# EAGLE board BaliseEmetteur (EAGLE 6.5.0)
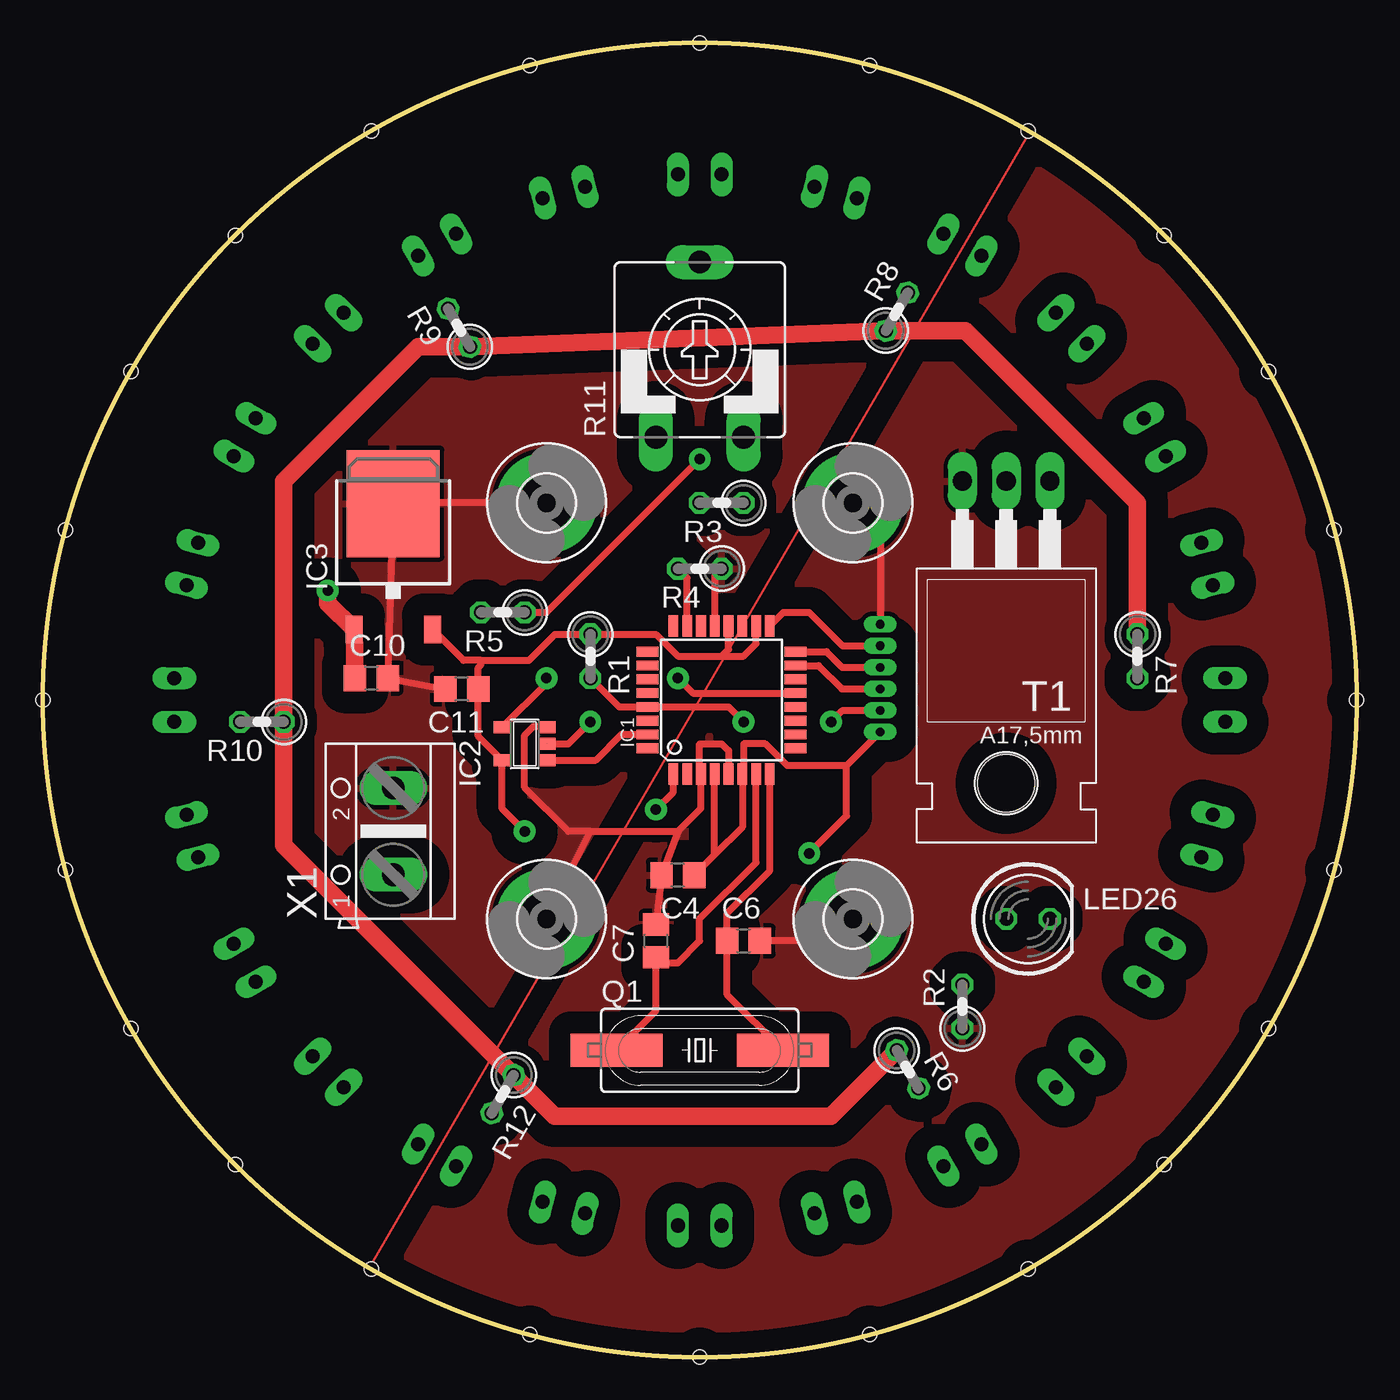
[diagram p0: board, top side]
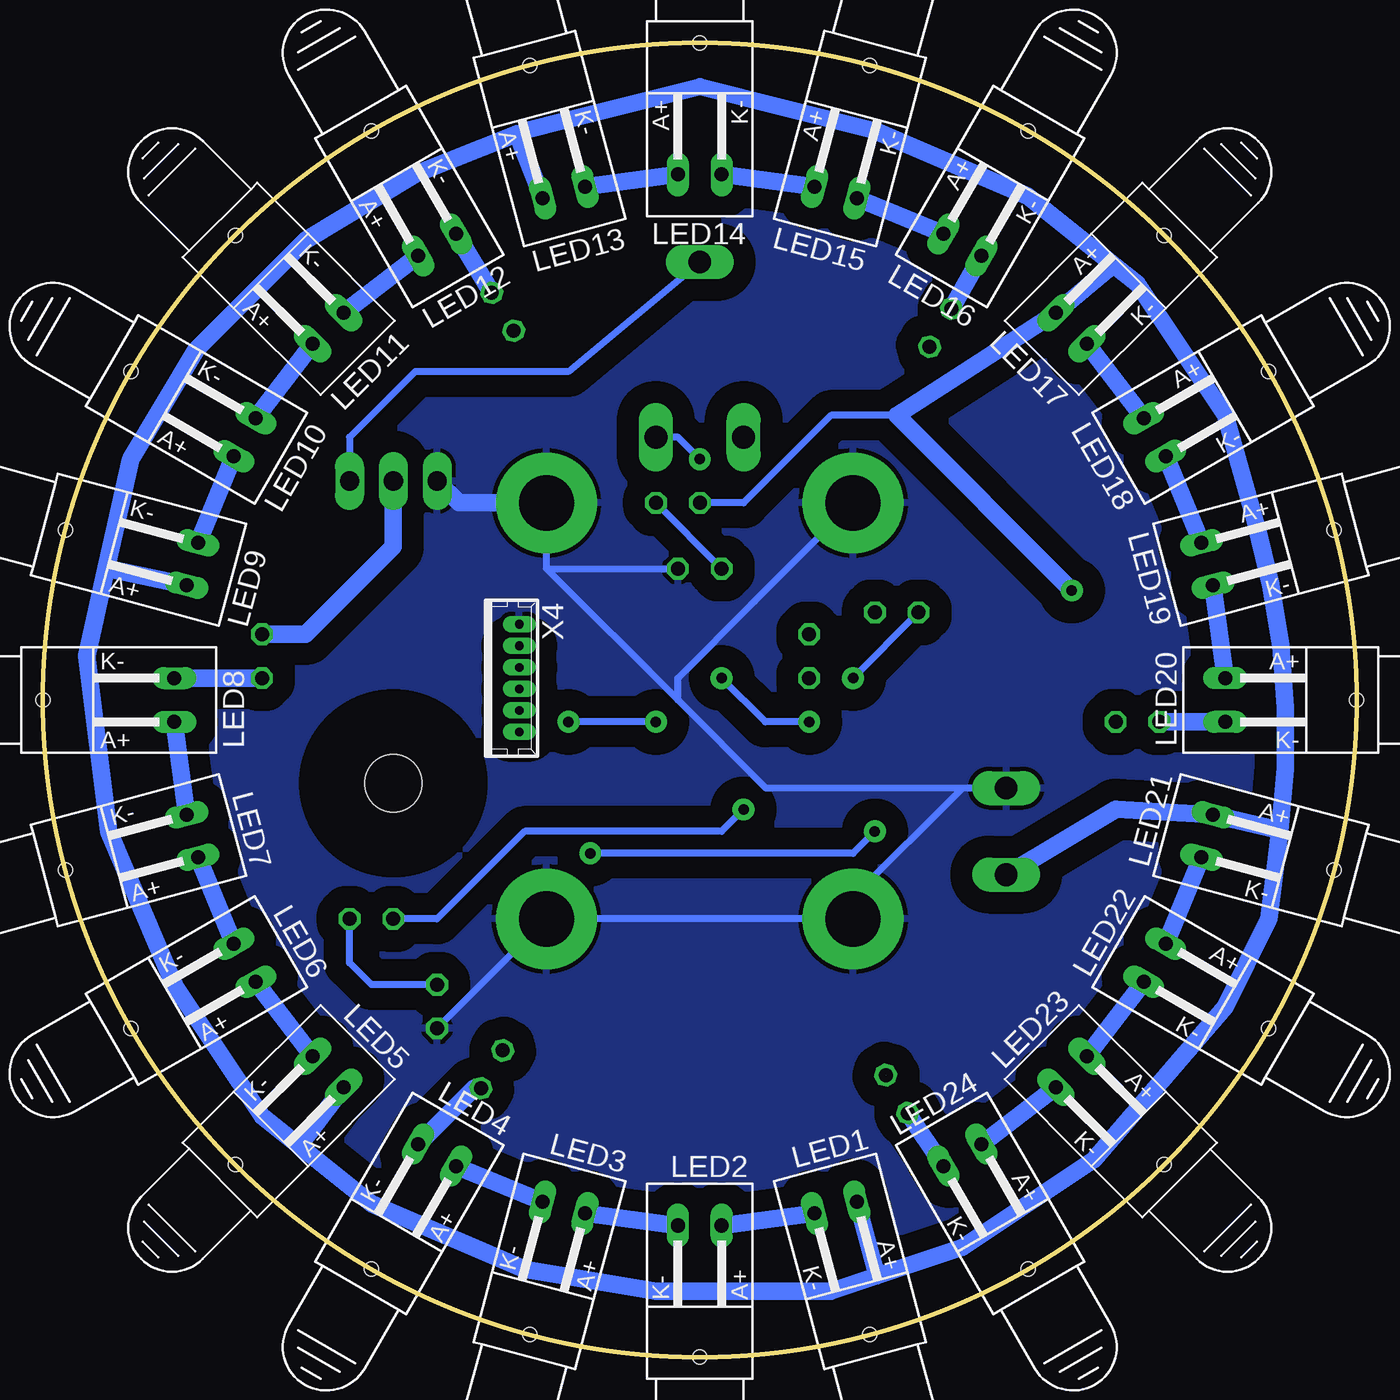
[diagram p1: board, bottom side, seen from below]

Size 76.2 x 76.2 mm. Coordinates in mm from the lower left corner, seen from the top.
Outline: circle at 38.1,38.1 radius 38.1
Copper layers (1*16): Top 0.035mm / dielectric 1.5mm / Bottom 0.035mm
Design rules "The PCB Shop": minimum track width 0.2mm, minimum drill 0.35mm, track to track 0.2mm, track to pad 0.2mm, pad to pad 0.2mm, via to via 0.2mm, smd to smd 0.2mm, copper to edge 30mil, drill to drill 10mil, minimum pad ring 0.225mm, minimum via ring 0.225mm, stop-mask expansion 0mil, vias tented up to drill 0mil, thermal gap 10mil

## Footprints (pad centres in the part's own frame; a part is rotated, then mirrored left to right if it is on the bottom)
C0805 = smd 1.3 x 1.5: 1 -0.95,0; 2 0.95,0
3,2-PAD = drill 3.2 pad 5.842: B3,2 0,0
TQFP32-08 = smd 1.27 x 0.559: 1 -4.293,2.8; 2 -4.293,2; 3 -4.293,1.2; 4 -4.293,0.4; 5 -4.293,-0.4; 6 -4.293,-1.2; 7 -4.293,-2; 8 -4.293,-2.8; 17 4.293,-2.8; 18 4.293,-2; 19 4.293,-1.2; 20 4.293,-0.4; 21 4.293,0.4; 22 4.293,1.2; 23 4.293,2; 24 4.293,2.8 | smd 0.559 x 1.27: 9 -2.8,-4.293; 10 -2,-4.293; 11 -1.2,-4.293; 12 -0.4,-4.293; 13 0.4,-4.293; 14 1.2,-4.293; 15 2,-4.293; 16 2.8,-4.293; 25 2.8,4.293; 26 2,4.293; 27 1.2,4.293; 28 0.4,4.293; 29 -0.4,4.293; 30 -1.2,4.293; 31 -2,4.293; 32 -2.8,4.293
SOT23-5 = smd 0.69 x 0.99: 1 -0.95,-1.29; 2 0,-1.29; 3 0.95,-1.29; 4 0.95,1.3; 5 -0.95,1.3
TO252 = smd 1 x 1.6: 1 -2.28,-4.8; 2 2.28,-4.8 | smd 5.4 x 6.2: 3 0,2.5
Q62902-B155 = drill 0.813 long: A 7.62,-1.27; K 7.62,1.27 | hole 0.813: 0,0
LED5MM = drill 0.813 octagon: A -1.27,0; K 1.27,0
HC49UP = smd 5.334 x 1.93: 1 -4.826,0; 2 4.826,0
0207/2V = drill 0.813 octagon: 1 -1.27,0; 2 1.27,0
CA9V = drill 1.321 long: A -2.54,-5.08; E 2.54,-5.08; S 0,5.08
TO220 = drill 1.118 long: 1 -2.54,-6.35; 2 0,-6.35; 3 2.54,-6.35 | hole 3.302: 0,11.176
AK500/2 = drill 1.321 long: 1 -2.515,0; 2 2.515,0
53047-06 = drill 0.5 pad 0.698 long: 1 3.125,0.45; 2 1.875,0.45; 3 0.625,0.45; 4 -0.625,0.45; 5 -1.875,0.45; 6 -3.125,0.45

## Placement (x,y rotation side)
C4  100nF  [C0805]  36.83,27.94 180 top
C6  22pF  [C0805]  40.64,24.13 0 top
C7  22pF  [C0805]  35.56,24.13 90 top
C10  330n  [C0805]  19.05,39.37 0 top
C11  100n  [C0805]  24.3,38.74 180 top
H1  [3,2-PAD]  46.99,49.53 0 top
H2  [3,2-PAD]  29.21,49.53 0 top
H3  [3,2-PAD]  46.99,25.4 0 top
H4  [3,2-PAD]  29.21,25.4 0 top
IC1  MEGA8-AI  [TQFP32-08]  39.37,38.1 90 top
IC2  74AHC1G02DBV  [SOT23-5]  27.94,35.56 90 top
IC3  7805DT  [TO252]  20.32,46.99 0 top
LED1  [Q62902-B155]  28.24,1.3 105 bottom
LED2  [Q62902-B155]  38.1,0 90 bottom
LED3  [Q62902-B155]  47.96,1.3 75 bottom
LED4  [Q62902-B155]  57.15,5.1 60 bottom
LED5  [Q62902-B155]  65.04,11.16 45 bottom
LED6  [Q62902-B155]  71.1,19.05 30 bottom
LED7  [Q62902-B155]  74.9,28.24 15 bottom
LED8  [Q62902-B155]  76.2,38.1 0 bottom
LED9  [Q62902-B155]  74.9,47.96 345 bottom
LED10  [Q62902-B155]  71.1,57.15 330 bottom
LED11  [Q62902-B155]  65.04,65.04 315 bottom
LED12  [Q62902-B155]  57.15,71.1 300 bottom
LED13  [Q62902-B155]  47.96,74.9 285 bottom
LED14  [Q62902-B155]  38.1,76.2 270 bottom
LED15  [Q62902-B155]  28.24,74.9 255 bottom
LED16  [Q62902-B155]  19.05,71.1 240 bottom
LED17  [Q62902-B155]  11.16,65.04 225 bottom
LED18  [Q62902-B155]  5.1,57.15 210 bottom
LED19  [Q62902-B155]  1.3,47.96 195 bottom
LED20  [Q62902-B155]  0,38.1 180 bottom
LED21  [Q62902-B155]  1.3,28.24 165 bottom
LED22  [Q62902-B155]  5.1,19.05 150 bottom
LED23  [Q62902-B155]  11.16,11.16 135 bottom
LED24  [Q62902-B155]  19.05,5.1 120 bottom
LED26  [LED5MM]  57.15,25.4 0 top
Q1  16MHz  [HC49UP]  38.1,17.78 0 top
R1  10k  [0207/2V]  31.75,40.64 270 top
R2  470  [0207/2V]  53.34,20.32 90 top
R3  10k  [0207/2V]  39.37,49.53 180 top
R4  10k  [0207/2V]  38.1,45.72 180 top
R5  4k7  [0207/2V]  26.67,43.18 180 top
R6  10  [0207/2V]  50.16,16.68 300 top
R7  10  [0207/2V]  63.5,40.64 270 top
R8  10  [0207/2V]  49.53,60.62 60 top
R9  10  [0207/2V]  24.13,59.69 120 top
R10  10  [0207/2V]  12.7,36.83 180 top
R11  220k  [CA9V]  38.1,58.42 0 top
R12  10  [0207/2V]  26.67,15.24 240 top
T1  TIP122  [TO220]  55.88,44.45 180 top
X1  ALIM  [AK500/2]  20.32,30.48 90 top
X4  ISP  [53047-06]  49.02,39.37 270 bottom

## Library data of the parts
C4 C6 C7 C10 C11 R1-R10 R12 = rcl
H1-H4 = holes
IC1 = atmel
IC2 = 74xx-little-us
IC3 = linear
LED1-LED24 LED26 = led
Q1 = crystal
R11 = pot
T1 = transistor
X1 = con-ptr500
X4 = con-molex

## Nets
+5V: C4.1 C11.1 IC1.4 IC1.6 IC1.18 IC1.20 IC2.5 IC3.2 R1.1 X4.1
+12V: C10.1 IC3.1 LED1.A LED5.A LED9.A LED13.A LED17.A LED21.A R3.2 X1.1
BATT_ADC: IC1.23 R3.1 R4.2
GND: C4.2 C6.2 C7.2 C10.2 C11.2 H1.B3,2 H2.B3,2 H3.B3,2 H4.B3,2 IC1.3 IC1.5 IC1.21 IC2.3 IC3.3 R2.1 R4.1 T1.3 X1.2 X4.6
ISP_MISO: IC1.16 X4.4
ISP_MOSI: IC1.15 X4.3
ISP_RST: IC1.29 R1.2 X4.2
ISP_SCK: IC1.17 X4.5
N$1: LED26.K R2.2
N$2: LED1.K LED2.A
N$3: R5.1 R11.E
N$4: IC1.1 LED26.A
N$5: LED3.K LED4.A
N$6: LED6.K LED7.A
N$7: LED5.K LED6.A
N$8: C7.1 IC1.7 Q1.1
N$9: C6.1 IC1.8 Q1.2
N$10: LED7.K LED8.A
N$11: LED18.K LED19.A
N$12: LED9.K LED10.A
N$13: LED2.K LED3.A
N$14: LED11.K LED12.A
N$16: LED13.K LED14.A
N$17: R6.1 R7.1 R8.1 R9.1 R10.1 R12.1 T1.2
N$18: LED15.K LED16.A
N$20: LED22.K LED23.A
N$21: LED17.K LED18.A
N$22: LED19.K LED20.A
N$23: LED4.K R6.2
N$24: LED21.K LED22.A
N$25: LED10.K LED11.A
N$26: LED23.K LED24.A
N$27: LED8.K R7.2
N$28: LED14.K LED15.A
N$29: LED12.K R8.2
N$30: LED16.K R9.2
N$31: R11.S T1.1
N$32: LED20.K R10.2
N$33: LED24.K R12.2
N$35: IC2.4 R5.2
PWM: IC1.13 IC2.2
UART_TX: IC1.31 IC2.1

## Tracks (layer width: path | path; a pad name or v marks a point on that pad's centre or on a via)
+5V  (via drill 0.61 pad 1.27)
  Top 0.406: IC3.2 24.39,40.4 25.4,40.4 | 39.37,40.64 36.83,40.64 35.56,41.91 R1.1 29.7,41.91 28.18,40.4 25.4,40.4 | 39.37,40.64 39.77,41.04 IC1.20 | IC1.18 41.37,41.37 40.64,40.64 39.37,40.64 | 38.97,29.13 IC1.4 | 38.97,29.13 C4.1 | 38.97,29.13 40.57,30.73 IC1.6 40.64,33.88 40.64,35.56 41.91,35.56 43.18,34.29 46.62,34.29 | 27.91,30.51 v27.94,30.48 26.64,31.78 IC2.5 25.25,36 C11.1 25.25,39.98 25.4,40.13 25.4,40.4 | 46.62,34.29 X4.1 | v44.45,29.21 46.62,31.38 46.62,34.29
  Bottom 0.406: v27.94,30.48 29.21,29.21 v44.45,29.21
+12V  (via drill 0.61 pad 1.27)
  Top 1.016: C10.1 IC3.1 16.51,43.72 v16.51,44.45
  Bottom 0.406: 48.26,71.12 48.7,70.94 | R3.2 35.56,49.53 30.48,54.61 26.67,54.61
  Bottom 1.016: 4.43,30.56 4.77,27.9 5.08,25.4 7.62,20.32 15.24,11.43 22.86,6.35 27.81,4.7 | 4.43,30.56 arc-23 5.8,48.23 7.62,54.61 12.7,62.23 14.09,63.34 | 14.09,63.34 19.05,67.31 27.94,71.12 38.1,73.66 45.87,71.72 48.26,71.12 | 72.52,45.75 73.66,40.64 72.39,30.48 68.58,21.59 63.5,13.97 61.33,12.24 | 72.52,45.75 71.99,48.17 71.12,52.07 67.31,58.42 60.96,64.77 54.61,68.58 48.7,70.94 LED13.A | 61.33,12.24 57.15,8.89 48.26,5.08 40.64,3.81 30.48,3.81 27.81,4.7 | 4.43,30.56 LED21.A 13.97,31.75 X1.1 | 14.09,63.34 LED17.A 26.67,54.61 v16.51,44.45 | 72.52,45.75 LED9.A | 61.33,12.24 LED5.A | 27.81,4.7 LED1.A | v16.51,44.45
BATT_ADC
  Top 0.406: R4.2 37.37,45.18 IC1.23
  Bottom 0.406: R4.2 R3.1
GND
  Top 0.406: H2.B3,2 20.36,49.53 IC3.3 C10.2 C11.2 | 36.83,30.48 38.17,31.82 IC1.3 38.1,33.88 38.1,35.56 39.37,35.56 39.77,35.16 IC1.5 | 31.75,30.48 36.83,30.48 | 36.83,30.48 C4.2 C7.2 | H4.B3,2 31.75,30.48 | IC1.21 38.97,45.32 R4.1 | 29.21,36.51 IC2.3 29.16,36.58 28.45,36.58 27.94,36.07 27.94,33.02 30.48,30.48 31.75,30.48 | C6.2 45.72,24.13 H3.B3,2 | X4.6 48.57,47.95 H1.B3,2
  Bottom 0.406: X1.2 22.86,32.99 | 22.86,32.99 25.4,32.99 34.26,32.99 39.37,38.1 | 39.37,38.1 39.37,39.37 34.92,43.81 H2.B3,2 | 46.99,45.72 H1.B3,2 | 39.37,38.1 46.99,45.72 | R4.1 46.99,45.72 | R2.1 H3.B3,2 H4.B3,2 29.21,26.64 22.86,32.99 | R2.1
  Bottom 1.016: T1.3 52.07,49.53 H1.B3,2
  pour Top (isolate 1.27): 86.36,85.09 -8.89,85.09 -8.89,-12.7 86.36,-12.7
  pour Bottom (isolate 1.27): -8.89,85.09 86.36,85.09 86.36,-12.7 -8.89,-12.7
ISP_MISO
  Top 0.406: IC1.16 45.46,40.9 46.37,39.99 X4.4
ISP_MOSI
  Top 0.406: IC1.15 44.99,40.1 46.34,38.74 X4.3
ISP_RST  (via drill 0.61 pad 1.27)
  Top 0.406: R1.2 33.42,37.7 IC1.29 39.77,37.7 v40.64,36.83 | v45.72,36.83 46.38,37.49 X4.2
  Bottom 0.406: v40.64,36.83 v45.72,36.83
ISP_SCK
  Top 0.406: IC1.17 42.96,43.18 44.45,43.18 46.38,41.24 X4.5
N$1
  Bottom 0.406: R2.2 57.15,21.59 58.42,22.86 LED26.K | LED26.K
N$2
  Bottom 1.016: LED1.K LED2.A
N$3  (via drill 0.61 pad 1.27)
  Top 0.406: R5.1 29.21,43.18 v38.1,52.07
  Bottom 0.406: v38.1,52.07 39.37,53.34 R11.E
N$4  (via drill 0.61 pad 1.27)
  Top 0.406: IC1.1 36.57,32.76 v35.56,31.75
  Bottom 0.406: v35.56,31.75 36.83,30.48 48.26,30.48 53.34,25.4 LED26.A | LED26.A
N$5
  Bottom 1.016: LED3.K LED4.A
N$6
  Bottom 1.016: LED6.K LED7.A
N$7
  Bottom 1.016: LED5.K LED6.A
N$8
  Top 0.406: Q1.1 35.56,20.07 C7.1 35.88,22.86 36.83,22.86 38.1,24.13 38.1,25.4 41.37,28.67 IC1.7
N$9
  Top 0.406: Q1.2 39.69,21.02 C6.1 39.69,25.72 42.17,28.2 IC1.8
N$10
  Bottom 1.016: LED7.K LED8.A
N$11
  Bottom 1.016: LED19.A LED18.K
N$12
  Bottom 1.016: LED9.K LED10.A
N$13
  Bottom 1.016: LED2.K LED3.A
N$14
  Bottom 1.016: LED12.A LED11.K
N$16
  Bottom 1.016: LED14.A LED13.K
N$17  (2 unrouted)
  Top 1.016: R6.1 45.72,13.97 29.67,13.97 R12.1 13.97,29.68 R10.1 13.97,50.8 21.76,58.59 R9.1 R8.1 53.51,59.52 63.5,49.53 R7.1
  Bottom 1.016: T1.2 55.88,46.99 60.96,41.91 R7.1
N$18
  Bottom 1.016: LED16.A LED15.K
N$20
  Bottom 1.016: LED23.A LED22.K
N$21
  Bottom 1.016: LED18.A LED17.K
N$22
  Bottom 1.016: LED20.A LED19.K
N$23
  Bottom 0.406: R6.2 51.2,15.58
  Bottom 1.016: 51.2,15.58 LED4.K
N$24
  Bottom 1.016: LED22.A LED21.K
N$25
  Bottom 1.016: LED10.K LED11.A
N$26
  Bottom 1.016: LED24.A LED23.K
N$27
  Bottom 1.016: R7.2 LED8.K
N$28
  Bottom 1.016: LED15.A LED14.K
N$29  (1 unrouted)
  Bottom 1.016: R8.2 LED12.K
N$30  (1 unrouted)
  Bottom 1.016: R9.2 LED16.K
N$31
  Bottom 0.406: R11.S 45.72,57.15 54.61,57.15 58.42,53.34 T1.1
N$32
  Bottom 1.016: LED20.K R10.2
N$33
  Bottom 1.016: LED24.K R12.2
N$35  (via drill 0.61 pad 1.27)
  Top 0.406: v29.21,39.37 29.21,39.08 IC2.4
  Bottom 0.406: v29.21,39.37 R5.2 | v29.21,39.37
PWM  (via drill 0.61 pad 1.27)
  Top 0.406: IC2.2 30.48,35.56 v31.75,36.83 | v36.83,39.37 37.7,38.5 IC1.13
  Bottom 0.406: v31.75,36.83 34.29,36.83 v36.83,39.37
UART_TX
  Top 0.406: IC2.1 32.07,34.61 33.56,36.1 IC1.31
(copper drawn outside any net)
  shapes: Top area x1